# Altium PCB bmsSlavePCB_R.PcbDoc (part 3 of 3)
Units mm, origin at the board's own origin, x right, y up, seen from the top; angles counter-clockwise.
Board outline 161.93 x 135.51 mm, 2 copper layers (Top Layer, Bottom Layer); 207 components, 152 nets, 533 pads, 59 vias.
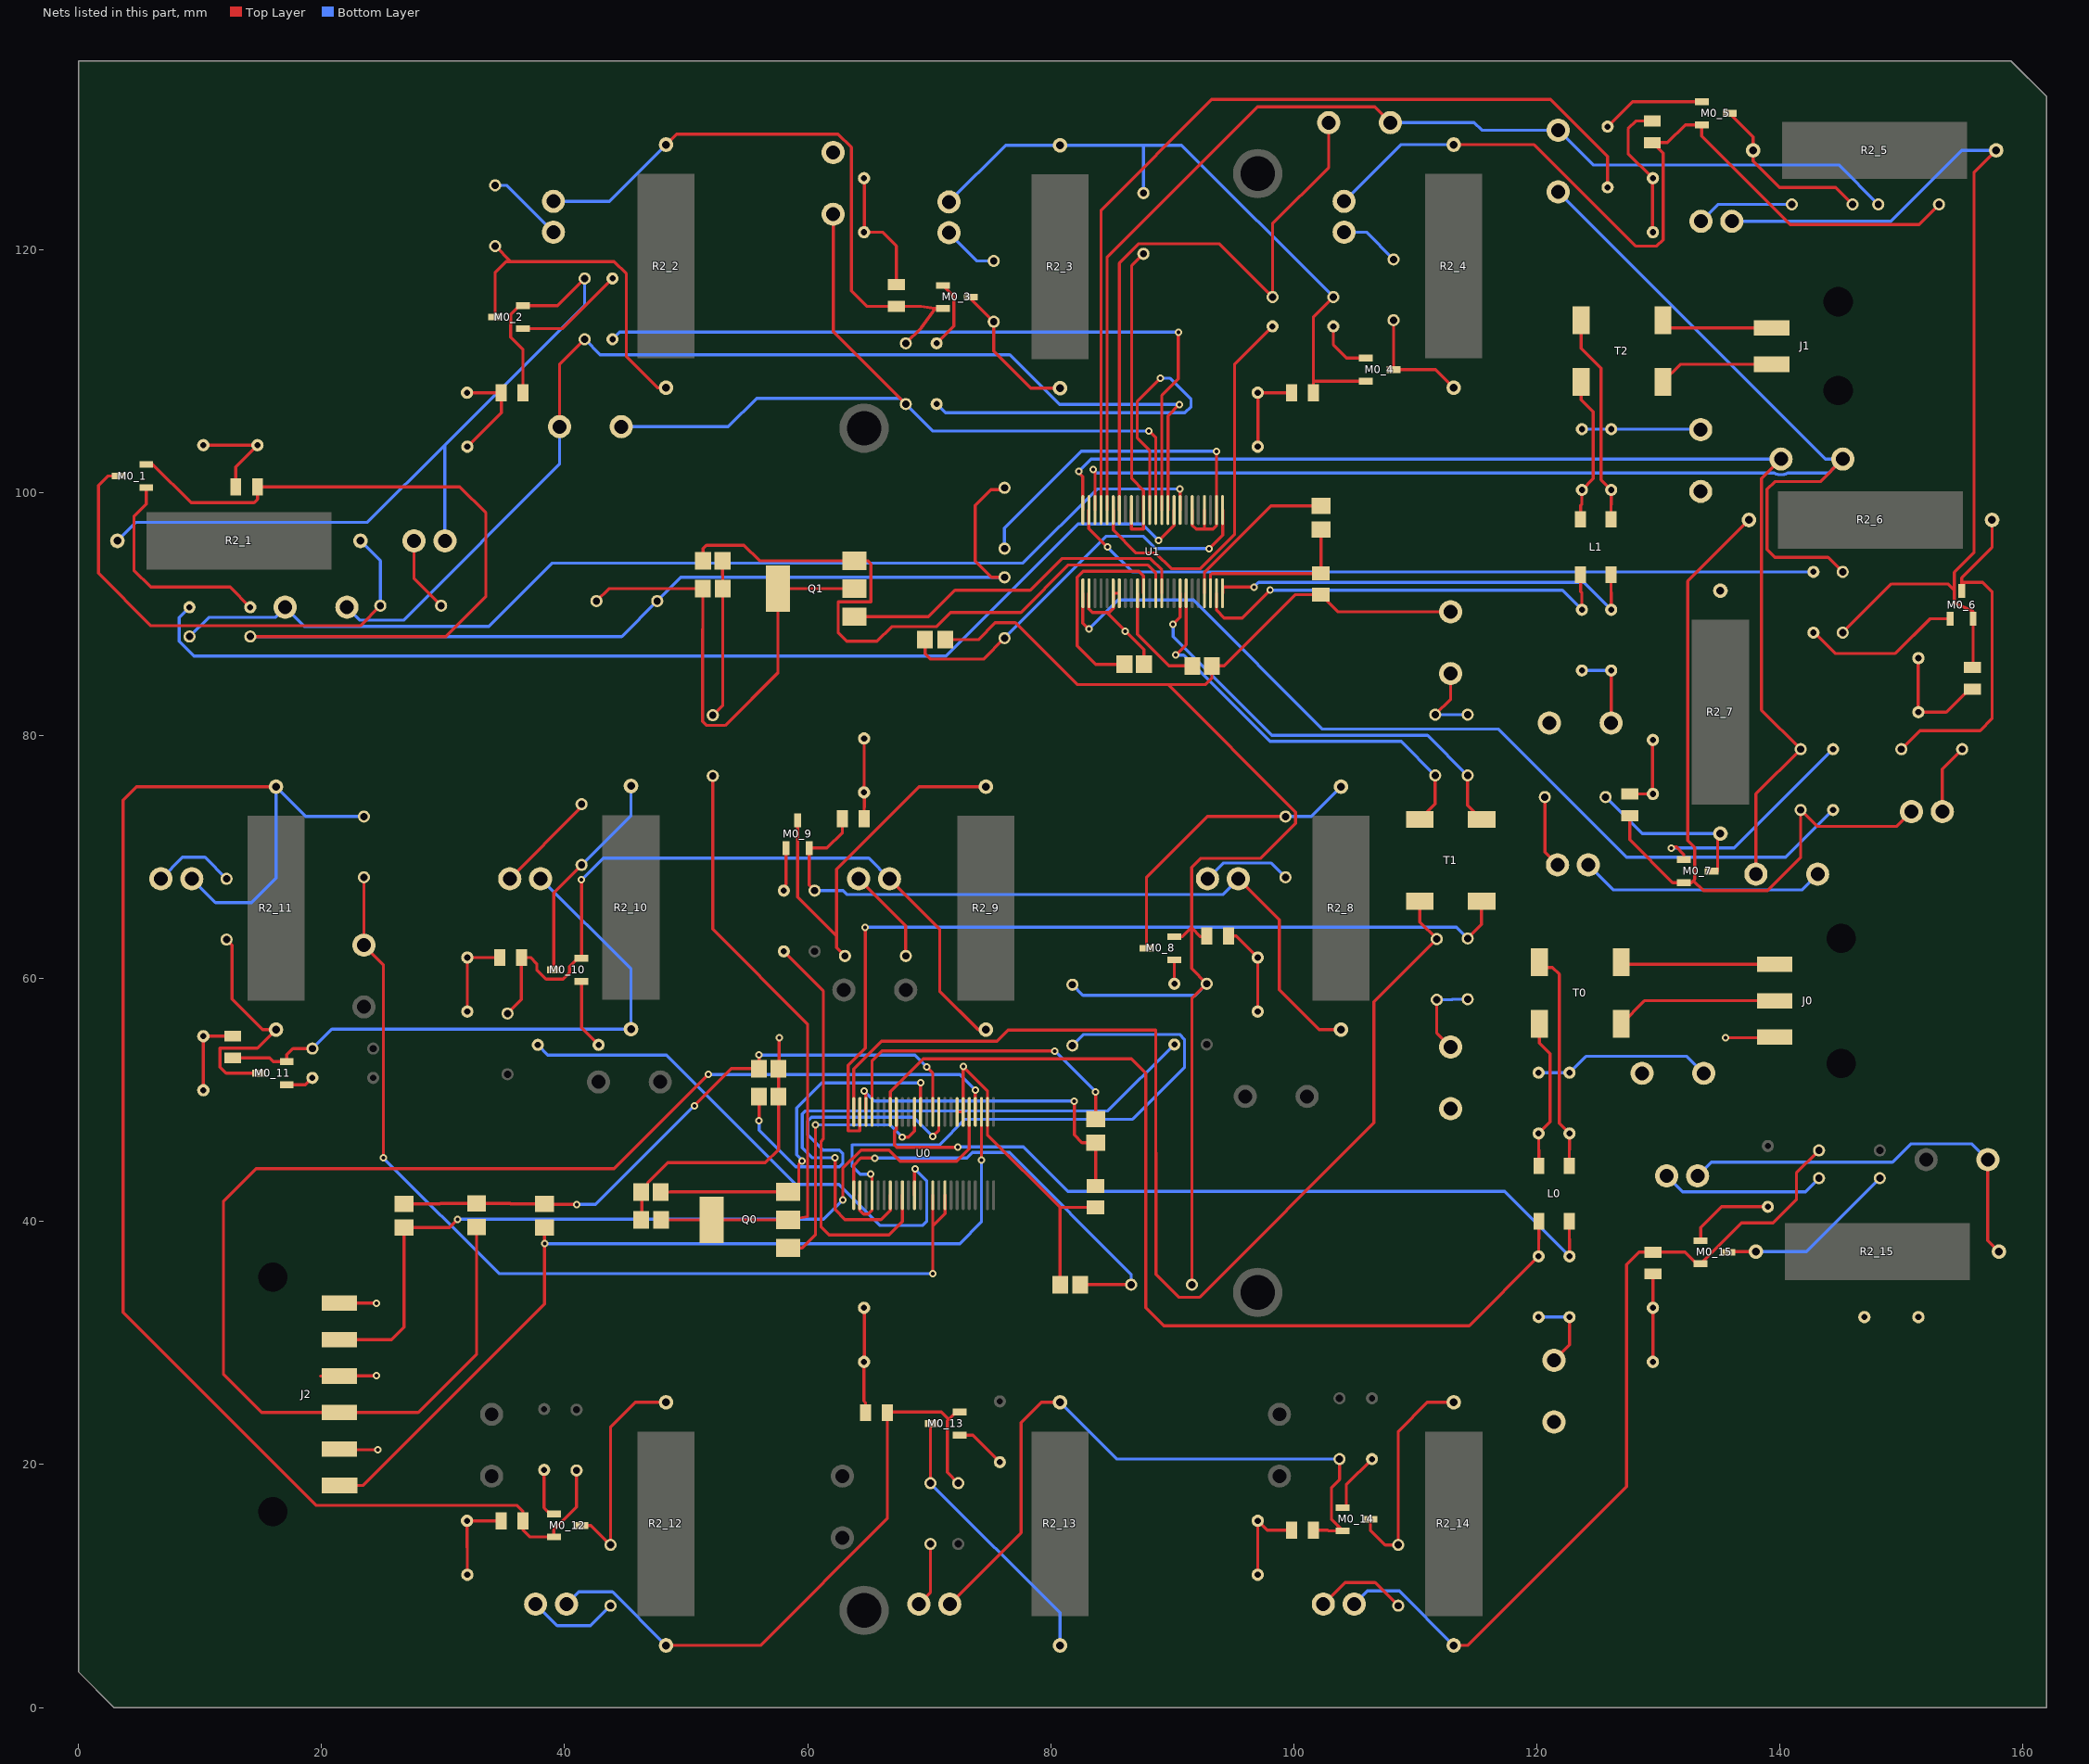
[diagram p2: the nets of this part, all layers, seen from the top]

## Via types
v1: diameter 0.61, hole 0.305, Top Layer to Bottom Layer, 59 vias

## Nets (pads, with @x,y where several pads share a name; then routed paths per layer and width w, separated by ;. In a path a pad name is that pad's centre, name@x,y a point inside that pad or via, vN(x,y) a via of type N, cw(c..) or ccw(c..) an arc to the next point about the centre after c; other vN are vias at no path point) (continued)
1-S8: R0_10.1 U0.11 | length 45.2
  Top Layer w0.254: U0.11@68.795,42.164 68.795,44.284 v1(68.834,44.323)
  Bottom Layer w0.254: R0_10.1@37.799,54.53 38.629,53.7 48.397,53.7 59.043,43.053 62.56,43.053 65.938,39.675 69.469,39.675 69.799,40.005 69.799,43.358 v1(68.834,44.323)
1-S9: R0_9.1 U0.9 | length 33.7
  Top Layer w0.254: R0_9.1@58.039,62.23 61.29,58.979 61.29,46.795 61.106,46.611 61.106,39.548 61.764,38.89 66.68,38.89 67.795,40.005 U0.9@67.795,42.164
1-S10: R0_8.1 U0.7 | length 49.5
  Top Layer w0.254: v1(62.255,45.237) 62.255,40.97 63.074,40.152 66.026,40.152 66.795,40.92 U0.7@66.795,42.164
  Bottom Layer w0.254: v1(62.255,45.237) 60.395,45.237 59.563,46.07 59.563,48.844 59.817,49.098 84.705,49.098 R0_8.1@90.17,54.563
2-C1: C0_6.1 C0_7.2 R1_7.1 U1.24 | length 99.2
  Top Layer w0.254: v1(82.296,101.727) 82.296,101.631 82.642,101.285 U1.24@82.642,98.548 ; C0_7.2@138.016,68.58 138.016,75.184 R1_7.1@141.699,78.867 138.481,82.085 138.481,101.143 C0_6.1@140.081,102.743
  Bottom Layer w0.254: v1(82.296,101.727) 83.312,102.743 C0_6.1@140.081,102.743
2-C2: C0_5.1 C0_6.2 R1_6.1 U1.22 | length 117.4
  Top Layer w0.254: v1(83.49,101.879) 83.642,101.727 U1.22@83.642,98.548 ; R1_6.1@145.161,93.458 143.953,94.666 139.573,94.666 138.938,95.301 138.938,100.254 139.573,100.889 143.307,100.889 C0_6.2@145.161,102.743
  Bottom Layer w0.254: v1(83.49,101.879) 83.695,101.674 83.769,101.6 139.499,101.6 ccw(c140.081,102.743) 140.663,101.6 144.018,101.6 C0_6.2@145.161,102.743 143.733,102.743 C0_5.1@121.752,124.724
2-C3: C0_4.1 C0_5.2 R1_5.1 U1.20 | length 92.7
  Top Layer w0.254: U1.20@84.642,98.548 84.642,119.361 97.005,131.724 106.655,131.724 C0_4.1@107.95,130.429
  Bottom Layer w0.254: C0_4.1@107.95,130.429 114.833,130.429 115.459,129.804 C0_5.2@121.752,129.804 124.612,126.943 144.837,126.943 R1_5.1@148.082,123.698
2-C4: C0_4.2 R1_4.1 U1.18 | length 51.7
  Top Layer w0.254: U1.18@85.642,98.548 85.642,118.857 87.249,120.464 93.865,120.464 R1_4.1@98.251,116.078 98.251,122.127 102.87,126.746 C0_4.2@102.87,130.429
2-C7: C0_2.1 C0_3.2 R1_3.1 U1.12 | length 70.3
  Top Layer w0.254: C0_3.2@62.103,122.889 62.103,113.237 R1_3.1@68.072,107.268 ; v1(88.087,105.054) 88.642,104.5 U1.12@88.642,98.548
  Bottom Layer w0.254: C0_2.1@44.671,105.41 53.467,105.41 55.804,107.747 67.593,107.747 R1_3.1@68.072,107.268 70.286,105.054 v1(88.087,105.054)
2-C8: C0_1.1 C0_2.2 R1_2.1 U1.10 | length 94.6
  Top Layer w0.254: C0_2.2@39.591,105.41 39.591,110.537 R1_2.1@41.656,112.602 ; U1.10@89.642,98.548 89.642,106.303 v1(90.576,107.238)
  Bottom Layer w0.254: C0_1.1@22.098,90.551 23.165,89.484 26.772,89.484 39.591,102.304 C0_2.2@39.591,105.41 ; R1_2.1@41.656,112.602 42.93,111.328 76.632,111.328 80.722,107.238 v1(90.576,107.238)
2-C9: C0_1.2 R1_1.1 U1.8 | length 89.6
  Top Layer w0.254: U1.8@90.642,98.548 v1(90.642,100.279)
  Bottom Layer w0.254: R1_1.1@9.144,88.138 10.719,89.713 16.18,89.713 C0_1.2@17.018,90.551 18.593,88.976 33.782,88.976 38.989,94.183 77.724,94.183 83.82,100.279 v1(90.642,100.279)
2-S1: R0_7.1 U1.25 | length 75.8
  Top Layer w0.254: U1.25@82.642,91.698 82.642,89.24 v1(83.134,88.748)
  Bottom Layer w0.254: v1(83.134,88.748) 85.522,91.135 91.745,91.135 102.362,80.518 116.84,80.518 127.381,69.977 140.476,69.977 R0_7.1@144.366,73.867
2-S2: R0_6.1 U1.23 | length 62.6
  Top Layer w0.254: U1.23@83.142,98.548 83.142,97.02 v1(84.658,95.504)
  Bottom Layer w0.254: v1(84.658,95.504) 86.704,93.458 R0_6.1@142.748,93.458
2-S3: R0_5.1 U1.21 | length 74.6
  Top Layer w0.254: U1.21@84.142,98.548 84.142,123.233 93.243,132.334 121.133,132.334 125.816,127.651 R0_5.1@125.816,125.105
2-S4: R0_4.1 U1.19 | length 32.5
  Top Layer w0.254: U1.19@85.142,98.548 85.142,96.901 87.027,95.016 88.626,95.016 89.916,93.726 92.317,93.726 95.124,96.533 95.124,110.538 R0_4.1@98.251,113.665
2-S7: R0_3.1 U1.13 | length 37.3
  Top Layer w0.254: U1.13@88.142,98.548 88.142,103.45 87.122,104.47 87.122,107.493 v1(89.027,109.398)
  Bottom Layer w0.254: R0_3.1@70.612,107.268 71.327,106.553 91.034,106.553 91.542,107.061 91.542,107.645 89.789,109.398 v1(89.027,109.398)
2-S8: R0_2.1 U1.11 | length 62
  Top Layer w0.254: U1.11@89.142,98.548 89.142,107.989 90.5,109.347 v1(90.5,113.182)
  Bottom Layer w0.254: R0_2.1@43.942,112.602 44.522,113.182 v1(90.5,113.182)
2-S9: R0_1.1 U1.9 | length 92.3
  Top Layer w0.254: v1(88.88,96.037) 90.142,97.299 U1.9@90.142,98.548
  Bottom Layer w0.254: R0_1.1@9.144,90.551 8.306,89.713 8.306,87.757 9.525,86.538 71.374,86.538 82.245,97.409 87.508,97.409 v1(88.88,96.037)
GPIO1: J2.1 R35.1 U0.27 | length 75.1
  Top Layer w0.254: J2.1@21.502,18.281 23.437,18.281 38.354,33.198 v1(38.354,38.176) R35.1@38.354,39.497 ; v1(74.295,45.034) U0.27@74.295,49.014
  Bottom Layer w0.254: v1(38.354,38.176) 72.517,38.176 74.295,39.954 v1(74.295,45.034)
GPIO2: J2.3 R36.1 U0.28 | length 117.3
  Top Layer w0.254: R36.1@32.766,39.538 32.766,29.083 27.964,24.281 J2.3@21.472,24.281 15.089,24.281 11.938,27.432 11.938,41.656 14.63,44.348 44.069,44.348 v1(51.816,52.095) ; U0.28@73.795,49.014 v1(73.795,50.817)
  Bottom Layer w0.254: v1(51.816,52.095) 72.517,52.095 v1(73.795,50.817)
GPIO3: J2.5 R37.1 U0.29 | length 68.4
  Top Layer w0.254: J2.5@21.472,30.281 25.781,30.281 26.797,31.297 R37.1@26.797,39.497 30.531,39.497 v1(31.217,40.183) ; v1(62.89,41.758) 62.89,44.374 64.389,45.872 66.7,45.872 67.615,44.958 72.263,44.958 73.295,45.99 U0.29@73.295,49.014
  Bottom Layer w0.254: v1(31.217,40.183) 61.316,40.183 v1(62.89,41.758)
IMA-1: L0.1 R9.1 U0.41 | length 65
  Top Layer w0.254: U0.41@67.295,49.014 67.295,47.574 67.158,47.437 67.158,46.279 67.336,46.101 v1(72.344,46.101) ; L0.1@122.662,40.016 122.662,38.577 122.682,38.557 R9.1@122.682,37.131
  Bottom Layer w0.254: v1(72.344,46.101) 72.37,46.127 77.762,46.127 81.42,42.469 117.344,42.469 R9.1@122.682,37.131
IMA-2: R39.2 T1.3 U1.41 | length 36.9
  Top Layer w0.254: v1(90.067,89.154) 90.642,89.729 U1.41@90.642,91.698 ; R39.2@114.3,76.708 114.3,74.231 T1.3@115.443,73.088
  Bottom Layer w0.254: v1(90.067,89.154) 90.067,88.125 98.183,80.01 110.998,80.01 R39.2@114.3,76.708
IMB-1: R33.1 T1.2 U0.47 | length 73.3
  Top Layer w0.254: U0.47@64.295,49.014 64.295,47.449 63.338,47.449 63.338,52.848 64.745,54.254 v1(64.745,64.211) ; R33.1@114.3,63.293 115.443,64.436 T1.2@115.443,66.358
  Bottom Layer w0.254: v1(64.745,64.211) 113.382,64.211 R33.1@114.3,63.293
IMB-2: L1.4 R11.2 U1.47 | length 36.3
  Top Layer w0.254: U1.47@93.642,91.698 93.642,90.297 94.276,89.663 95.759,89.663 v1(98.044,91.948) ; L1.4@123.591,93.229 123.591,91.826 123.698,91.719 R11.2@123.698,90.344
  Bottom Layer w0.254: v1(98.044,91.948) 122.094,91.948 R11.2@123.698,90.344
In1-A: J0.2 T0.1 | length 13.4
  Top Layer w0.254: T0.1@126.936,56.261 128.841,58.166 J0.2@139.564,58.166
In1-B: J0.1 T0.2 | length 12.7
  Top Layer w0.254: T0.2@126.936,61.341 127.112,61.166 J0.1@139.564,61.166
IPA-1: L0.4 R8.2 U0.42 | length 81.8
  Top Layer w0.254: U0.42@66.795,49.014 66.795,50.666 69.514,53.385 86.645,53.385 87.833,52.197 87.833,32.893 89.306,31.42 114.431,31.42 R8.2@120.142,37.131 120.142,38.557 120.162,38.577 L0.4@120.162,40.016
IPA-2: R38.1 T1.4 U1.42 | length 35
  Top Layer w0.254: v1(90.297,86.614) 91.142,87.459 U1.42@91.142,91.698 ; T1.4@110.363,73.088 111.633,74.358 R38.1@111.633,76.708
  Bottom Layer w0.254: v1(90.297,86.614) 90.932,86.614 98.044,79.502 108.839,79.502 R38.1@111.633,76.708
IPB-1: R32.2 T1.1 U0.48 | length 95.4
  Top Layer w0.254: U0.48@63.795,49.014 63.795,52.543 66.091,54.839 75.59,54.839 76.505,55.753 88.646,55.753 88.671,35.636 90.551,33.757 92.227,33.757 106.578,48.108 106.578,58.064 R32.2@111.76,63.246 110.363,64.643 T1.1@110.363,66.358
IPB-2: L1.1 R10.1 U1.48 | length 36.5
  Top Layer w0.254: U1.48@94.142,91.698 94.142,92.202 v1(96.723,92.202) ; L1.1@126.091,93.229 126.091,91.79 126.111,91.77 R10.1@126.111,90.344
  Bottom Layer w0.254: v1(96.723,92.202) 97.104,92.583 123.872,92.583 R10.1@126.111,90.344
NetC0_2: C0.2 R0.1 U0.1 | length 34.9
  Top Layer w0.254: U0.1@63.795,42.164 63.795,44.627 64.38,45.212 v1(65.532,45.212) ; C0.2@82.423,34.798 R0.1@86.614,34.798
  Bottom Layer w0.254: v1(65.532,45.212) 73.103,45.212 73.561,45.67 76.599,45.67 86.614,35.654 R0.1@86.614,34.798
NetC0_3_1: C0_3.1
NetC1_1: C1.1 Q0.2 Q0.4 R3.1 | length 51.6
  Top Layer w0.254: C1.1@47.942,40.132 Q0.4@52.095,40.132 Q0.2@58.395,40.132 59.995,40.402 59.995,56.261 52.197,64.059 R3.1@52.197,76.661
NetC2_2: C2.2 Q0.3 U0.37 | length 32
  Top Layer w0.254: C2.2@47.917,42.418 48.692,42.418 48.706,42.432 Q0.3@58.395,42.432 59.268,42.432 59.268,44.694 v1(59.538,44.963) ; U0.37@69.295,49.014 v1(69.295,51.41)
  Bottom Layer w0.254: v1(59.538,44.963) 59.538,45.06 59.106,45.491 59.106,49.352 61.163,51.41 v1(69.295,51.41)
NetC4_2: C4.2 U0.34 | length 29.8
  Top Layer w0.254: v1(56.007,48.311) C4.2@56.007,50.292 ; v1(70.287,47.011) 70.795,47.519 U0.34@70.795,49.014
  Bottom Layer w0.254: v1(56.007,48.311) 56.007,47.504 59.016,44.495 62.611,44.495 62.89,44.774 62.89,45.593 62.611,45.872 61.287,45.872 60.02,47.139 60.02,48.285 60.325,48.59 68.708,48.59 v1(70.287,47.011)
NetC14_1: C14.1 R32.1 R33.2 | length 6.9
  Top Layer w0.254: R32.1@111.76,58.246 111.76,55.499 C14.1@112.903,54.356
  Bottom Layer w0.254: R32.1@111.76,58.246 113.005,58.246 113.052,58.293 R33.2@114.3,58.293
NetC16_2: C16.2 R38.2 R39.1 | length 6.6
  Top Layer w0.254: R38.2@111.633,81.708 112.903,82.978 C16.2@112.903,85.09
  Bottom Layer w0.254: R38.2@111.633,81.708 R39.1@114.3,81.708
NetC17_2: C17.2 R41.1 U1.1 | length 33
  Top Layer w0.254: C17.2@69.66,87.884 69.66,86.728 70.109,86.279 74.468,86.279 R41.1@76.2,88.011 ; v1(93.04,95.377) 94.142,96.479 U1.1@94.142,98.548
  Bottom Layer w0.254: R41.1@76.2,88.011 84.582,96.393 87.605,96.393 88.621,95.377 v1(93.04,95.377)
NetC18_1: C18.1 Q1.2 Q1.4 R43.1 | length 41.4
  Top Layer w0.254: R43.1@42.625,91.059 43.641,92.075 C18.1@51.372,92.075 51.372,88.773 51.359,88.76 51.359,81.153 51.689,80.823 53.213,80.823 57.556,85.166 Q1.4@57.556,92.075 Q1.2@63.856,92.075
NetC19_2: C19.2 Q1.3 U1.37 | length 54.9
  Top Layer w0.254: C19.2@51.397,94.361 51.397,95.377 51.676,95.656 54.762,95.656 56.044,94.375 Q1.3@63.856,94.375 64.934,94.375 65.202,94.107 65.202,90.983 62.509,90.983 62.509,88.468 63.221,87.757 65.71,87.757 66.904,88.951 70.587,88.951 71.755,90.119 77.546,90.119 81.458,94.031 87.956,94.031 88.642,93.345 U1.37@88.642,91.698
NetC20_2: C20.2 U1.35 | length 17.4
  Top Layer w0.254: C20.2@86.068,85.852 83.693,85.852 82.169,87.376 82.169,93.015 82.677,93.523 87.249,93.523 87.642,93.13 U1.35@87.642,91.698
NetC21_2: C21.2 U1.34 | length 9
  Top Layer w0.254: U1.34@87.142,91.698 87.142,88.306 89.723,85.725 C21.2@91.656,85.725
NetC22_2: C22.2 R6.1 R7.2 | length 14.7
  Bottom Layer w0.254: R6.1@120.142,52.244 R7.2@122.682,52.244 124.032,53.594 132.334,53.594 C22.2@133.731,52.197
NetC23_2: C23.2 R8.1 R9.2 | length 6.6
  Top Layer w0.254: C23.2@121.412,28.575 122.682,29.845 R9.2@122.682,32.131
  Bottom Layer w0.254: R8.1@120.142,32.131 R9.2@122.682,32.131
NetC24_2: C24.2 R10.2 R11.1 | length 6.7
  Top Layer w0.254: C24.2@126.111,81.026 R10.2@126.111,85.344
  Bottom Layer w0.254: R11.1@123.698,85.344 R10.2@126.111,85.344
NetC25_2: C25.2 R12.2 R13.1 | length 9.8
  Bottom Layer w0.254: R13.1@123.698,105.203 R12.2@126.111,105.203 133.43,105.203 C25.2@133.477,105.156
NetD0_1_1: D0_1.1 R3_1.2 | length 6.3
  Top Layer w0.254: D0_1.1@27.62,96.012 27.62,92.903 R3_1.2@29.845,90.678
NetD0_1_2: D0_1.2 F0_2.1 M0_2.2 R1_2.2 R2_1.1 | length 70.8
  Top Layer w0.254: F0_2.1@36.582,108.204 36.582,111.754 35.56,112.776 35.56,114.653 36.284,115.377 M0_2.2@36.576,115.377 39.431,115.377 R1_2.2@41.656,117.602
  Bottom Layer w0.254: R2_1.1@3.208,96.012 4.732,97.536 23.8,97.536 30.16,103.897 ; D0_1.2@30.16,96.012 30.16,103.897 ; R1_2.2@41.656,117.602 41.656,115.392 30.16,103.897
NetD0_2_1: D0_2.1 R3_2.2 | length 6.4
  Bottom Layer w0.254: R3_2.2@34.29,125.269 35.226,125.269 D0_2.1@39.083,121.412
NetD0_2_2: D0_2.2 F0_3.1 M0_3.2 R1_3.2 R2_2.1 | length 50.9
  Top Layer w0.254: R2_2.1@48.354,128.618 49.225,129.489 62.509,129.489 63.602,128.397 63.602,116.58 64.872,115.31 F0_3.1@67.31,115.31 69.342,115.31 70.485,115.128 ; R1_3.2@68.072,112.268 69.342,113.538 70.485,115.128 ; M0_3.2@71.12,115.128 70.485,115.128
  Bottom Layer w0.254: D0_2.2@39.083,123.952 43.688,123.952 R2_2.1@48.354,128.618
NetD0_3_1: D0_3.1 R3_3.2 | length 4.6
  Bottom Layer w0.254: D0_3.1@71.628,121.365 73.947,119.046 R3_3.2@75.311,119.046
NetD0_3_2: D0_3.2 F0_4.1 M0_4.2 R1_4.2 R2_3.1 R58.2 | length 55.5
  Top Layer w0.254: F0_4.1@101.612,108.204 101.612,109.159 ; R1_4.2@103.251,116.078 101.612,114.439 101.612,109.159 ; M0_4.2@105.918,109.159 101.612,109.159
  Bottom Layer w0.254: D0_3.2@71.628,123.905 76.294,128.571 R2_3.1@80.772,128.571 87.63,128.571 ; R58.2@87.63,124.634 87.63,128.571 ; R1_4.2@103.251,116.078 90.758,128.571 87.63,128.571
NetD0_4_1: D0_4.1 R3_4.2 | length 5
  Bottom Layer w0.254: D0_4.1@104.14,121.412 105.965,121.412 R3_4.2@108.204,119.173
NetD0_4_2: D0_4.2 F0_5.1 M0_5.2 R1_5.2 R2_4.1 | length 69
  Top Layer w0.254: R2_4.1@113.157,128.618 119.769,128.618 128.118,120.269 129.87,120.269 130.378,120.777 130.378,127.903 F0_5.1@129.499,128.782 130.734,128.782 132.203,130.251 M0_5.2@133.563,130.251 133.563,129.327 140.843,122.047 151.431,122.047 R1_5.2@153.082,123.698
  Bottom Layer w0.254: D0_4.2@104.14,123.952 108.806,128.618 R2_4.1@113.157,128.618
NetD0_5_1: D0_5.1 R3_5.2 | length 8
  Bottom Layer w0.254: D0_5.1@133.497,122.311 134.885,123.698 R3_5.2@140.97,123.698
NetD0_5_2: D0_5.2 F0_6.1 M0_6.2 R1_6.2 R2_5.1 | length 80.3
  Top Layer w0.254: R1_6.2@145.161,88.458 149.169,92.466 153.797,92.466 154.33,91.933 ; F0_6.1@155.89,85.538 M0_6.2@155.89,89.601 155.89,90.211 154.33,90.917 154.33,91.933 ; R2_5.1@157.787,128.153 155.956,126.322 155.956,95.047 154.33,93.421 154.33,91.933
  Bottom Layer w0.254: D0_5.2@136.037,122.311 149.108,122.311 154.95,128.153 R2_5.1@157.787,128.153
NetD0_6_1: D0_6.1 R3_6.2 | length 5.8
  Top Layer w0.254: D0_6.1@153.355,73.726 153.355,77.235 R3_6.2@154.987,78.867
NetD0_6_2: D0_6.2 F0_7.1 M0_7.2 R1_7.2 R2_6.1 | length 65.2
  Top Layer w0.254: F0_7.1@127.635,73.394 127.635,71.415 131.166,67.884 M0_7.2@132.08,67.884 132.715,67.884 132.88,68.049 ; R2_6.1@137.447,97.729 132.41,92.692 132.41,71.349 132.994,70.764 132.994,68.163 132.88,68.049 ; D0_6.2@150.815,73.726 149.605,72.517 143.049,72.517 R1_7.2@141.699,73.867 141.699,69.969 138.963,67.234 133.695,67.234 132.88,68.049
NetD0_7_1: D0_7.1 R3_7.2 | length 6
  Top Layer w0.254: R3_7.2@120.65,74.93 120.65,70.386 D0_7.1@121.694,69.342
NetD0_8_1: D0_11.1 R3_11.2 | length 6.9
  Bottom Layer w0.254: D0_11.1@6.792,68.199 8.57,69.977 10.414,69.977 R3_11.2@12.192,68.199
NetD0_8_2: D0_11.2 F0_12.1 M0_12.2 R1_12.2 R2_11.1 R14.2 | length 129.8
  Top Layer w0.254: R2_11.1@16.256,75.786 4.793,75.786 3.683,74.676 3.683,32.512 19.558,16.637 36.074,16.637 36.582,16.129 F0_12.1@36.582,15.367 36.582,14.605 37.151,14.036 M0_12.2@39.116,14.036 39.116,14.618 40.988,16.49 R1_12.2@40.988,19.511
  Bottom Layer w0.254: D0_11.2@9.332,68.199 11.288,66.243 14.249,66.243 16.256,68.25 R2_11.1@16.256,75.786 18.716,73.326 R14.2@23.495,73.326
NetD0_9_1: D0_10.1 R3_10.2 | length 8.6
  Top Layer w0.254: D0_10.1@35.494,68.199 41.151,73.855 41.151,74.091 R3_10.2@41.402,74.342
NetD0_9_2: D0_10.2 F0_11.1 M0_11.2 R1_11.2 R2_10.1 | length 49.8
  Top Layer w0.254: F0_11.1@12.7,53.461 15.723,53.461 16.037,53.147 M0_11.2@17.145,53.147 17.145,53.721 17.653,54.229 R1_11.2@19.257,54.229
  Bottom Layer w0.254: R1_11.2@19.257,54.229 20.861,55.833 R2_10.1@45.466,55.833 45.466,60.767 D0_10.2@38.034,68.199
NetD0_10_1: D0_9.1 R3_9.2 | length 8
  Top Layer w0.254: D0_9.1@64.196,68.199 68.072,64.323 R3_9.2@68.072,61.849
NetD0_10_2: D0_9.2 F0_10.1 M0_10.2 R1_10.2 R2_9.1 | length 61.4
  Top Layer w0.254: R1_10.2@35.306,57.117 36.455,58.266 F0_10.1@36.455,61.722 37.211,61.722 37.719,61.214 37.719,60.706 38.481,59.944 39.878,59.944 40.418,60.484 40.418,60.964 41.11,61.656 M0_10.2@41.402,61.656 v1(41.402,68.123) ; D0_9.2@66.736,68.199 70.866,64.069 70.866,58.953 74.033,55.786 R2_9.1@74.67,55.786
  Bottom Layer w0.254: v1(41.402,68.123) 43.18,69.901 65.035,69.901 D0_9.2@66.736,68.199
NetD0_11_1: D0_8.1 R3_8.2 | length 7.4
  Bottom Layer w0.254: D0_8.1@92.898,68.199 94.194,69.494 98.146,69.494 R3_8.2@99.314,68.326
NetD0_11_2: D0_8.2 F0_9.1 M0_9.2 R1_9.2 R2_8.1 | length 60.6
  Top Layer w0.254: R1_9.2@60.573,67.23 60.126,67.677 M0_9.2@60.126,70.739 61.589,70.739 62.859,72.009 F0_9.1@62.859,73.152 ; D0_8.2@95.438,68.199 98.806,64.831 98.806,59.055 102.075,55.786 R2_8.1@103.886,55.786
  Bottom Layer w0.254: R1_9.2@60.573,67.23 62.92,67.23 63.246,66.904 94.143,66.904 D0_8.2@95.438,68.199
NetD0_12_1: D0_12.1 R3_12.2 | length 7.6
  Bottom Layer w0.254: D0_12.1@37.62,8.509 39.398,6.731 42.131,6.731 R3_12.2@43.782,8.382
NetD0_12_2: D0_12.2 F0_13.1 M0_13.2 R1_13.2 R2_12.1 | length 53.9
  Top Layer w0.254: R2_12.1@48.354,5.113 56.116,5.113 66.554,15.551 F0_13.1@66.554,24.257 66.554,24.318 70.993,24.318 71.609,23.702 ; R1_13.2@72.39,18.462 71.501,19.351 71.501,23.594 71.609,23.702 ; M0_13.2@72.517,24.318 72.225,24.318 71.609,23.702
  Bottom Layer w0.254: D0_12.2@40.16,8.509 41.176,9.525 43.942,9.525 R2_12.1@48.354,5.113
NetD0_13_1: D0_13.1 R3_13.2 | length 5.3
  Top Layer w0.254: D0_13.1@69.154,8.509 70.104,9.459 R3_13.2@70.104,13.462
NetD0_13_2: D0_13.2 F0_14.1 M0_14.2 R1_14.2 R2_13.1 | length 55.2
  Top Layer w0.254: D0_13.2@71.694,8.509 77.564,14.379 77.564,23.436 79.24,25.113 R2_13.1@80.772,25.113 ; F0_14.1@101.606,14.605 102.768,14.605 102.829,14.544 M0_14.2@104.013,14.544 103.099,15.458 103.099,18.11 103.759,18.771 R1_14.2@103.759,20.447
  Bottom Layer w0.254: R2_13.1@80.772,25.113 85.438,20.447 R1_14.2@103.759,20.447
NetD0_14_1: D0_14.1 R3_14.2 | length 7.7
  Top Layer w0.254: D0_14.1@102.429,8.509 104.207,10.287 106.686,10.287 R3_14.2@108.591,8.382
NetD0_14_2: D0_14.2 F0_15.1 M0_15.2 R1_15.2 R2_14.1 | length 70.2
  Top Layer w0.254: R2_14.1@113.163,5.113 114.308,5.113 127.381,18.186 127.381,36.455 128.397,37.471 F0_15.1@129.54,37.471 132.182,37.471 133.138,36.515 M0_15.2@133.477,36.515 136.84,39.878 139.446,39.878 141.351,41.783 141.351,43.989 R1_15.2@143.209,45.847
  Bottom Layer w0.254: D0_14.2@104.969,8.509 106.062,9.601 108.675,9.601 R2_14.1@113.163,5.113
NetD0_15_1: D0_15.1 R3_15.2 | length 13.5
  Bottom Layer w0.254: D0_15.1@130.678,43.749 131.984,42.443 142.091,42.443 R3_15.2@143.209,43.561
NetF0_1_2: F0_1.2 J0_1.0 J1_1.0 | length 8.6
  Top Layer w0.254: J0_1.0@10.287,103.886 J1_1.0@14.732,103.886 12.948,102.102 F0_1.2@12.948,100.457
NetF0_2_2: F0_2.2 J0_2.0 J1_2.0 | length 8.4
  Top Layer w0.254: J0_2.0@31.971,108.204 F0_2.2@34.792,108.204 34.792,106.547 J1_2.0@32.004,103.759
NetF0_3_2: F0_3.2 J0_3.0 J1_3.0 | length 10.8
  Top Layer w0.254: J0_3.0@64.643,121.412 J0_3.0@64.668,121.412 ; J1_3.0@64.643,125.857 64.668,125.832 J0_3.0@64.668,121.412 ; F0_3.2@67.31,117.1 67.31,120.269 66.167,121.412 J0_3.0@64.668,121.412
NetF0_4_2: F0_4.2 J0_4.0 J1_4.0 | length 7.3
  Top Layer w0.254: J1_4.0@97.028,103.759 97.053,103.784 97.053,107.645 97.028,107.67 J0_4.0@97.028,108.204 F0_4.2@99.822,108.204
NetF0_5_2: F0_5.2 J0_5.0 J1_5.0 | length 11.6
  Top Layer w0.254: F0_5.2@129.499,130.572 128.159,130.572 127.508,129.921 127.508,127.889 J1_5.0@129.54,125.857 129.515,125.832 129.515,121.437 J0_5.0@129.54,121.412
NetF0_6_2: F0_6.2 J0_6.0 J1_6.0 | length 9.7
  Top Layer w0.254: J0_6.0@151.384,86.36 151.359,86.335 151.359,81.94 151.39,81.909 153.677,81.909 155.582,83.814 F0_6.2@155.829,83.814
NetF0_7_2: F0_7.2 J0_7.0 J1_7.0 | length 6.4
  Top Layer w0.254: F0_7.2@127.635,75.184 J0_7.0@129.54,75.184 129.515,75.209 129.515,79.604 J1_7.0@129.54,79.629
NetF0_8_2: F0_11.2 J0_11.0 J1_11.0 | length 6.9
  Top Layer w0.254: J0_11.0@10.287,50.8 10.287,52.299 J1_11.0@10.287,55.245 10.293,55.251 F0_11.2@12.7,55.251
NetF0_9_2: F0_10.2 J0_10.0 J1_10.0 | length 7.1
  Top Layer w0.254: J1_10.0@32.004,57.277 J0_10.0@32.004,61.722 F0_10.2@34.665,61.722
NetF0_10_2: F0_9.2 J0_9.0 J1_9.0 | length 6.6
  Top Layer w0.254: J0_9.0@64.646,79.753 64.646,75.844 64.64,75.838 J1_9.0@64.64,75.308 64.668,75.279 64.668,74.086 64.649,74.066 F0_9.2@64.649,73.152
NetF0_11_2: F0_8.2 J0_8.0 J1_8.0 | length 7.6
  Top Layer w0.254: F0_8.2@94.621,63.5 95.25,63.5 J0_8.0@97.028,61.722 J1_8.0@97.028,57.277
NetF0_12_2: F0_12.2 J0_12.0 J1_12.0 | length 7.3
  Top Layer w0.254: J1_12.0@32.004,10.922 32.004,13.132 31.971,13.165 J0_12.0@31.971,15.367 F0_12.2@34.792,15.367
NetF0_13_2: F0_13.2 J0_13.0 J1_13.0 | length 8.7
  Top Layer w0.254: J1_13.0@64.643,32.893 64.668,32.868 64.668,28.981 64.643,28.956 J0_13.0@64.643,28.448 64.643,25.222 64.764,25.101 F0_13.2@64.764,24.257
NetF0_14_2: F0_14.2 J0_14.0 J1_14.0 | length 7.5
  Top Layer w0.254: J1_14.0@97.028,10.922 97.028,12.395 97.034,12.401 J0_14.0@97.034,15.367 97.796,14.605 F0_14.2@99.816,14.605
NetF0_15_2: F0_15.2 J0_15.0 J1_15.0 | length 7.2
  Top Layer w0.254: J1_15.0@129.54,28.448 J0_15.0@129.54,32.893 F0_15.2@129.54,35.681
NetL0_2: L0.2 R7.1 T0.3 | length 18.4
  Top Layer w0.254: T0.3@120.206,61.341 120.206,60.909 121.285,60.909 121.844,60.35 121.844,48.082 R7.1@122.682,47.244 122.682,45.892 122.662,45.872 L0.2@122.662,44.566
NetL0_3: L0.3 R6.2 T0.4 | length 12.5
  Top Layer w0.254: L0.3@120.162,44.566 120.162,45.872 120.142,45.892 R6.2@120.142,47.244 121.082,48.184 121.082,53.797 120.206,54.673 T0.4@120.206,56.261
NetL1_2: L1.2 R12.1 T2.1 | length 17.4
  Top Layer w0.254: T2.1@123.634,114.173 123.634,111.862 125.273,110.223 125.273,101.041 R12.1@126.111,100.203 126.111,98.978 126.091,98.958 L1.2@126.091,97.779
NetL1_3: L1.3 R13.2 T2.2 | length 12.2
  Top Layer w0.254: L1.3@123.591,97.779 123.591,98.933 123.698,99.04 R13.2@123.698,100.203 124.638,101.143 124.638,106.629 123.634,107.632 T2.2@123.634,109.093
NetM0_1_1: M0_1.1 R0_1.2 | length 18.1
  Top Layer w0.254: M0_1.1@5.588,100.396 5.588,99.035 4.572,98.019 4.572,93.599 5.969,92.202 12.493,92.202 R0_1.2@14.144,90.551
NetM0_1_3: M0_1.3 R2_1.2 R3_1.1 | length 40.9
  Top Layer w0.254: M0_1.3@3.302,101.346 2.413,101.346 1.651,100.584 1.651,93.345 5.969,89.027 23.194,89.027 R3_1.1@24.845,90.678
  Bottom Layer w0.254: R2_1.2@23.208,96.012 24.845,94.375 R3_1.1@24.845,90.678
NetM0_2_1: M0_2.1 R0_2.2 | length 9.1
  Top Layer w0.254: M0_2.1@36.576,113.477 39.817,113.477 R0_2.2@43.942,117.602
NetM0_2_3: M0_2.3 R2_2.2 R3_2.1 | length 28.2
  Top Layer w0.254: M0_2.3@34.29,114.427 34.29,118.11 35.179,118.999 35.56,118.999 ; R3_2.1@34.29,120.269 35.56,118.999 ; R2_2.2@48.354,108.618 47.643,108.618 45.085,111.176 45.085,117.983 44.069,118.999 35.56,118.999
NetM0_3_1: M0_3.1 R0_3.2 | length 5.7
  Top Layer w0.254: R0_3.2@70.612,112.268 72.034,113.69 72.034,116.114 M0_3.1@71.12,117.028
NetM0_3_3: M0_3.3 R2_3.2 R3_3.1 | length 12
  Top Layer w0.254: M0_3.3@73.406,116.078 73.406,115.951 R3_3.1@75.311,114.046 75.311,111.633 78.373,108.571 R2_3.2@80.772,108.571
NetM0_4_1: M0_4.1 R0_4.2 | length 4.6
  Top Layer w0.254: R0_4.2@103.251,113.665 103.251,112.141 104.333,111.059 M0_4.1@105.918,111.059
NetM0_4_3: M0_4.3 R2_4.2 R3_4.1 | length 9.6
  Top Layer w0.254: R3_4.1@108.204,114.173 M0_4.3@108.204,110.109 111.666,110.109 R2_4.2@113.157,108.618
NetM0_5_1: M0_5.1 R0_5.2 | length 8.6
  Top Layer w0.254: R0_5.2@125.816,130.105 127.862,132.151 M0_5.1@133.563,132.151
NetM0_5_3: M0_5.3 R2_5.2 R3_5.1 | length 14.4
  Top Layer w0.254: M0_5.3@135.849,131.201 137.787,129.263 R2_5.2@137.787,128.153 137.787,127.262 139.954,125.095 144.573,125.095 R3_5.1@145.97,123.698
NetM0_6_1: M0_6.1 R0_6.2 | length 13.1
  Top Layer w0.254: R0_6.2@142.748,88.458 142.809,88.458 144.526,86.741 149.479,86.741 152.339,89.601 M0_6.1@153.99,89.601
NetM0_6_3: M0_6.3 R2_6.2 R3_6.1 | length 28.6
  Top Layer w0.254: R3_6.1@149.987,78.867 151.511,80.391 156.464,80.391 157.447,81.374 157.447,91.821 156.685,92.583 154.94,92.583 ; M0_6.3@154.94,91.887 154.94,92.583 ; R2_6.2@157.447,97.729 157.447,95.471 154.94,92.964 154.94,92.583
NetM0_7_1: M0_7.1 R0_7.2 | length 18.4
  Top Layer w0.254: v1(131.064,70.739) 131.132,70.807 131.411,70.807 131.445,70.841 132.08,70.206 M0_7.1@132.08,69.784
  Bottom Layer w0.254: v1(131.064,70.739) 136.238,70.739 R0_7.2@144.366,78.867
NetM0_7_3: M0_7.3 R2_7.2 R3_7.1 | length 14.4
  Top Layer w0.254: M0_7.3@134.366,68.834 134.874,68.834 134.874,71.694 R2_7.2@135.095,71.915
  Bottom Layer w0.254: R3_7.1@125.65,74.93 128.665,71.915 R2_7.2@135.095,71.915
NetM0_8_1: M0_11.1 R0_11.2 | length 2.3
  Top Layer w0.254: M0_11.1@17.145,51.247 18.688,51.247 R0_11.2@19.257,51.816
NetM0_8_3: M0_11.3 R2_11.2 R3_11.1 | length 19.9
  Top Layer w0.254: R3_11.1@12.192,63.199 12.649,62.742 12.649,58.293 15.156,55.786 R2_11.2@16.256,55.786 14.724,54.254 11.659,54.254 11.659,52.705 12.167,52.197 M0_11.3@14.859,52.197
NetM0_9_1: M0_10.1 R0_10.2 | length 5.8
  Top Layer w0.254: M0_10.1@41.402,59.756 41.402,55.927 R0_10.2@42.799,54.53
NetM0_9_3: M0_10.3 R2_10.2 R3_10.1 | length 17.8
  Top Layer w0.254: M0_10.3@39.116,60.706 39.116,67.056 R3_10.1@41.402,69.342
  Bottom Layer w0.254: R3_10.1@41.402,69.342 45.466,73.406 R2_10.2@45.466,75.833
NetM0_10_1: M0_9.1 R0_9.2 | length 3.6
  Top Layer w0.254: R0_9.2@58.039,67.23 58.182,67.373 58.182,67.708 58.226,67.752 M0_9.1@58.226,70.739
NetM0_10_3: M0_9.3 R2_9.2 R3_9.1 | length 33.4
  Top Layer w0.254: M0_9.3@59.176,73.025 59.176,66.684 62.372,63.488 ; R3_9.1@63.072,61.849 62.372,62.549 62.372,63.488 ; R2_9.2@74.67,75.786 69.182,75.786 62.372,68.976 62.372,63.488
NetM0_11_1: M0_8.1 R0_8.2 | length 2
  Top Layer w0.254: R0_8.2@90.17,59.563 M0_8.1@90.17,61.534
NetM0_11_3: M0_8.3 R2_8.2 R3_8.1 | length 24.9
  Top Layer w0.254: M0_8.3@87.884,62.484 87.884,68.326 92.884,73.326 R3_8.1@99.314,73.326
  Bottom Layer w0.254: R3_8.1@99.314,73.326 101.426,73.326 R2_8.2@103.886,75.786
NetM0_12_1: M0_12.1 R0_12.2 | length 4.1
  Top Layer w0.254: R0_12.2@38.321,19.558 38.321,16.439 38.824,15.936 M0_12.1@39.116,15.936
NetM0_12_3: M0_12.3 R2_12.2 R3_12.1 | length 18.2
  Top Layer w0.254: M0_12.3@41.402,14.986 42.178,14.986 R3_12.1@43.782,13.382 43.782,23.081 45.814,25.113 R2_12.2@48.354,25.113
NetM0_13_1: M0_13.1 R0_13.2 | length 4.2
  Top Layer w0.254: M0_13.1@72.517,22.418 73.594,22.418 R0_13.2@75.819,20.193
NetM0_13_3: M0_13.3 R2_13.2 R3_13.1 | length 22.8
  Top Layer w0.254: R3_13.1@70.104,18.462 70.104,23.368 M0_13.3@70.231,23.368
  Bottom Layer w0.254: R3_13.1@70.104,18.462 80.772,7.794 R2_13.2@80.772,5.113
NetM0_14_1: M0_14.1 R0_14.2 | length 5.2
  Top Layer w0.254: M0_14.1@104.013,16.444 104.318,16.444 104.318,18.339 R0_14.2@106.426,20.447
NetM0_14_3: M0_14.3 R2_14.2 R3_14.1 | length 18.6
  Top Layer w0.254: M0_14.3@106.299,15.494 106.299,14.605 107.522,13.382 R3_14.1@108.591,13.382 108.591,22.733 110.971,25.113 R2_14.2@113.163,25.113
NetM0_15_1: M0_15.1 R0_15.2 | length 7.3
  Top Layer w0.254: M0_15.1@133.477,38.415 133.477,39.497 135.189,41.209 R0_15.2@138.999,41.209
NetM0_15_3: M0_15.3 R2_15.2 R3_15.1 | length 15
  Top Layer w0.254: M0_15.3@135.763,37.465 135.824,37.526 R2_15.2@138.016,37.526
  Bottom Layer w0.254: R2_15.2@138.016,37.526 142.174,37.526 R3_15.1@148.209,43.561
NetQ0_1: Q0.1 U0.38 | length 22.1
  Top Layer w0.254: Q0.1@58.395,37.832 59.543,37.832 60.649,38.938 60.649,47.949 v1(60.655,47.955) ; v1(67.793,46.939) 68.301,46.939 68.795,47.434 U0.38@68.795,49.014
  Bottom Layer w0.254: v1(60.655,47.955) 66.777,47.955 v1(67.793,46.939)
NetQ1_1: Q1.1 U1.38 | length 29.6
  Top Layer w0.254: Q1.1@63.856,89.775 69.952,89.775 72.125,91.948 78.308,91.948 80.919,94.559 88.194,94.559 89.142,93.611 U1.38@89.142,91.698
NetR2_1: R2.1 U0.2 U0.4 | length 51.1
  Top Layer w0.254: U0.2@64.295,42.164 64.295,40.92 64.606,40.609 64.984,40.609 65.295,40.92 U0.4@65.295,42.164 65.295,43.773 v1(65.176,43.891)
  Bottom Layer w0.254: v1(65.176,43.891) 64.338,43.891 63.652,44.577 63.652,46.279 63.678,46.304 70.845,46.304 72.953,48.412 86.741,48.412 91,52.672 91,54.991 90.598,55.393 82.698,55.393 R2.1@81.788,54.483
NetR4_2: R4.2 R5.1 U0.46 | length 27.8
  Top Layer w0.254: v1(64.643,50.749) 64.795,50.597 U0.46@64.795,49.014 ; v1(81.94,49.904) 81.94,47.117 82.575,46.482 R5.1@83.693,46.482 R4.2@83.693,42.912
  Bottom Layer w0.254: v1(64.643,50.749) 65.488,49.904 v1(81.94,49.904)
NetR5_2: R5.2 U0.45 | length 26.6
  Top Layer w0.254: U0.45@65.295,49.014 65.295,53.213 66.108,54.026 v1(80.34,54.026) ; R5.2@83.693,48.432 v1(83.693,50.673)
  Bottom Layer w0.254: v1(80.34,54.026) v1(83.693,50.673)
NetR42_1: R42.1 U1.2 U1.4 U1.6 | length 32.9
  Top Layer w0.254: U1.6@91.642,98.548 91.642,97.304 91.969,96.977 92.583,96.977 ; U1.4@92.642,98.548 92.642,97.036 92.583,96.977 ; v1(93.642,103.378) U1.2@93.642,98.548 93.642,97.274 93.345,96.977 92.583,96.977
  Bottom Layer w0.254: R42.1@76.2,95.377 76.2,97.053 82.525,103.378 v1(93.642,103.378)
NetR44_2: R44.2 R45.1 U1.46 | length 14.3
  Top Layer w0.254: U1.46@93.142,91.698 93.142,93.196 93.277,93.331 R44.2@102.235,93.331 R45.1@102.235,96.942
NetR45_2: R45.2 U1.45 | length 13.6
  Top Layer w0.254: U1.45@92.642,91.698 92.642,93.404 98.13,98.892 R45.2@102.235,98.892
Out2-A: J1.1 T2.4 | length 9.6
  Top Layer w0.254: T2.4@130.365,114.173 130.365,113.538 J1.1@139.319,113.538
Out2-B: J1.2 T2.3 | length 9.6
  Top Layer w0.254: T2.3@130.365,109.093 131.81,110.538 J1.2@139.319,110.538
TopMuxTerm: C0_11.1 R14.1 U0.14 U0.16 | length 82.3
  Top Layer w0.254: R14.1@23.495,68.326 C0_11.1@23.495,62.738 25.095,61.138 v1(25.095,45.237) ; v1(70.295,35.712) 70.295,39.632 ; U0.14@70.295,42.164 70.295,39.632 ; U0.16@71.295,42.164 71.295,40.632 70.295,39.632
  Bottom Layer w0.254: v1(25.095,45.237) 34.62,35.712 v1(70.295,35.712)
TopMuxTerm-2: R58.1 U1.14 U1.16 | length 26
  Top Layer w0.254: U1.16@86.642,98.548 86.642,96.977 87.642,96.977 U1.14@87.642,98.548 87.642,100.147 86.665,101.124 86.665,118.669 R58.1@87.63,119.634
Vbot: C0.1 C0_15.1 C1.2 C2.1 C3.1 C4.1 C14.2 C22.1 C23.1 D0_15.2 J0.3 J2.2 J2.4 J2.6 J3.0 J4.0 R2_15.1 R4.1 U0.26 U0.30 U0.31 | length 101.2
  Top Layer w0.254: 19.938,27.281 J2.4@21.472,27.281 21.496,27.305 v1(24.511,27.305) ; J2.2@21.472,21.281 21.544,21.209 v1(24.638,21.209) ; J2.6@21.472,33.281 21.479,33.274 v1(24.511,33.274) ; C1.2@46.736,40.259 46.355,40.64 46.355,42.38 C2.1@46.317,42.418 46.84,42.941 46.84,43.183 48.488,44.831 56.515,44.831 57.607,45.923 C4.1@57.607,50.292 C3.1@57.607,52.578 57.658,52.629 v1(57.658,55.118) ; U0.31@72.295,49.014 U0.30@72.795,49.014 v1@72.795,52.749 ; v1@72.83,52.714 74.795,50.749 U0.26@74.795,49.014 74.795,47.117 80.75,41.162 ; C0.1@80.773,34.798 80.773,41.139 80.75,41.162 ; R4.1@83.693,41.162 80.75,41.162 ; v1(135.509,55.118) 139.516,55.118 J0.3@139.564,55.166 ; C0_15.1@157.099,45.085 157.099,38.443 R2_15.1@158.016,37.526
  Bottom Layer w0.254: D0_15.2@133.218,43.749 134.351,44.882 149.25,44.882 150.749,46.38 155.804,46.38 C0_15.1@157.099,45.085
  other v1: 72.794,52.75
Vmid: C0_7.1 C16.1 C17.1 C18.2 C19.1 C20.1 C21.1 C24.1 C25.1 D0_7.2 F0_8.1 M0_8.2 R0.2 R1_8.2 R2.2 R2_7.1 R3.2 R44.1 U1.26 U1.30 U1.31 | length 169
  Top Layer w0.254: R3.2@52.197,81.661 53.022,82.486 C18.2@53.022,92.075 53.022,93.193 52.997,93.218 C19.1@52.997,94.361 ; C17.1@71.31,87.884 74.041,87.884 75.438,89.281 77.089,89.281 82.182,84.188 89.649,84.188 ; U1.26@83.142,91.698 83.142,90.416 83.439,90.119 84.607,90.119 ; U1.31@85.642,91.698 U1.30@85.142,91.698 85.142,90.454 84.807,90.119 84.607,90.119 ; C20.1@87.668,85.852 87.668,87.059 84.607,90.119 ; M0_8.2@90.17,63.434 90.805,63.434 91.592,64.221 ; R0.2@91.614,34.798 91.614,58.34 R1_8.2@92.837,59.563 91.592,60.808 91.592,64.171 ; F0_8.1@92.831,63.5 92.831,63.434 92.329,63.434 91.592,64.171 ; C16.1@112.903,90.17 103.646,90.17 R44.1@102.235,91.581 100.115,91.581 94.259,85.725 C21.1@93.256,85.725 93.256,84.709 92.735,84.188 89.649,84.188 ; 89.649,84.188 100.152,73.685 100.152,72.771 97.257,69.875 92.329,69.875 91.592,69.139 91.592,64.221 ; 91.592,64.171 91.592,64.221
  Bottom Layer w0.254: R2.2@81.788,59.483 82.648,58.623 91.897,58.623 R1_8.2@92.837,59.563 ; D0_7.2@124.234,69.342 126.292,67.285 141.801,67.285 C0_7.1@143.096,68.58
  other v1: 86.138,88.589
Vref1: C3.2 R35.2 R36.2 R37.2 U0.35 | length 53.1
  Top Layer w0.254: R37.2@26.797,41.447 29.743,41.447 29.784,41.488 R36.2@32.766,41.488 35.535,41.488 35.576,41.447 R35.2@38.354,41.447 38.399,41.402 v1(41.021,41.402) ; v1(50.673,49.53) 53.721,52.578 C3.2@56.007,52.578 v1(56.007,53.696) ; v1(69.787,52.73) 70.295,52.222 U0.35@70.295,49.014
  Bottom Layer w0.254: v1(41.021,41.402) 42.545,41.402 v1(50.673,49.53) ; v1(56.007,53.696) 68.822,53.696 v1(69.787,52.73)
Vtop: F0_1.1 M0_1.2 R1_1.2 R41.2 R42.2 R43.2 | length 133.5
  Top Layer w0.254: M0_1.2@5.588,102.296 6.137,102.296 9.271,99.162 14.459,99.162 14.738,99.441 F0_1.1@14.738,100.457 31.369,100.457 33.528,98.298 33.528,91.44 30.226,88.138 R1_1.2@14.144,88.138 ; R41.2@76.2,93.011 75.137,93.011 73.787,94.361 73.787,98.933 75.088,100.234 76.057,100.234 R42.2@76.2,100.377
  Bottom Layer w0.254: R1_1.2@14.144,88.138 44.704,88.138 R43.2@47.625,91.059 49.577,93.011 R41.2@76.2,93.011
pads on no net: J0. J1. J2. R2_1.X R2_2.X R2_3.X R2_4.X R2_5.X R2_6.X R2_7.X R2_8.X R2_9.X R2_10.X R2_11.X R2_12.X R2_13.X R2_14.X R2_15.X U0.3 U0.5 U0.15 U0.17 U0.32 U0.33 U0.36 U0.39 U0.40 U0.43 U0.44 U1.3 U1.5 U1.7 U1.15 U1.17 U1.27 U1.28 U1.29 U1.32 U1.33 U1.36 U1.39 U1.40 U1.43 U1.44

## Polygon pours and split planes (outlines as drawn)
Vmid on Bottom Layer "NONET_L-01_P-001" (solid, remove dead copper, pour order 1): 1.905,79.375 63.373,79.375 63.373,80.899 65.913,80.899 65.913,79.375 105.791,79.375 118.491,66.675 160.02,66.675 160.02,133.985 32.385,133.985 32.385,109.855 27.305,104.775 1.905,104.775
Vbot on Bottom Layer "NONET_L-01_P-001" (solid, remove dead copper, pour order 0): 129.54,1.905 129.54,26.67 133.985,31.115 160.02,31.115 160.02,65.405 118.11,65.405 105.41,78.105 1.905,78.105 1.905,1.905

## Keep-outs
Keep-Out Layer:
  lines w0.254: 0,2.921 0,103.454 2.845,106.299 27.457,106.299 30.48,109.322 30.48,132.715 33.274,135.509 159.029,135.509 161.95,132.588 161.95,32.055 159.106,29.21 134.468,29.21 131.445,26.187 131.445,2.845 128.6,0 2.921,0 0,2.921

## Silkscreen, mask and mechanical layers (free items; w line width, h text height)
Top Overlay:
  drawing of 91 lines, arcs and shapes, not listed
  text "Cell 3" at 59.944,130.763 h5.08
  text "Cell 2" at 44.069,130.509 h5.08
  text "Cell 5" at 149.606,115.175 h5.08
  text "Cell 6" at 149.987,101.346 h5.08
  text "Cell 4" at 107.315,99.14 h5.08
  text "+" at 37.465,97.325 h5.08
  text "Cell 9" at 56.515,82.846 h5.08
  text "Cell 1" at 25.781,82.122 h5.08
  text "Cell 11" at 4.445,77.423 h5.08
  text "Cell 10" at 28.956,77.423 h5.08
  text "Cell 8" at 84.328,77.31 h5.08
  text "Cell 7" at 119.38,62.729 h5.08
  text "Cell 15" at 148.463,51.04 h5.08
  text "Cell 13" at 60.452,34.497 h5.08
  text "Cell 12" at 28.194,33.481 h5.08
  text "Cell 14" at 92.329,27.131 h5.08
  text "BMS Slave Board / Rev 1.0 / 2/3/21" at 1.829,10.541 h2
  text "-" at 123.571,7.494 h5.08